# Altium PCB PCB-CPU-fixe1.PcbDoc (part 1 of 3)
Units mil, origin at the board's own origin, x right, y up, seen from the top; angles counter-clockwise.
Board outline 6040 x 4120 mil, 6 copper layers (Top Layer, GND, Mid-Layer2, Mid-Layer3, VDD33, Bottom Layer); 111 components, 315 nets, 963 pads, 730 vias.
Unrouted connection lines stored in the file: 3.
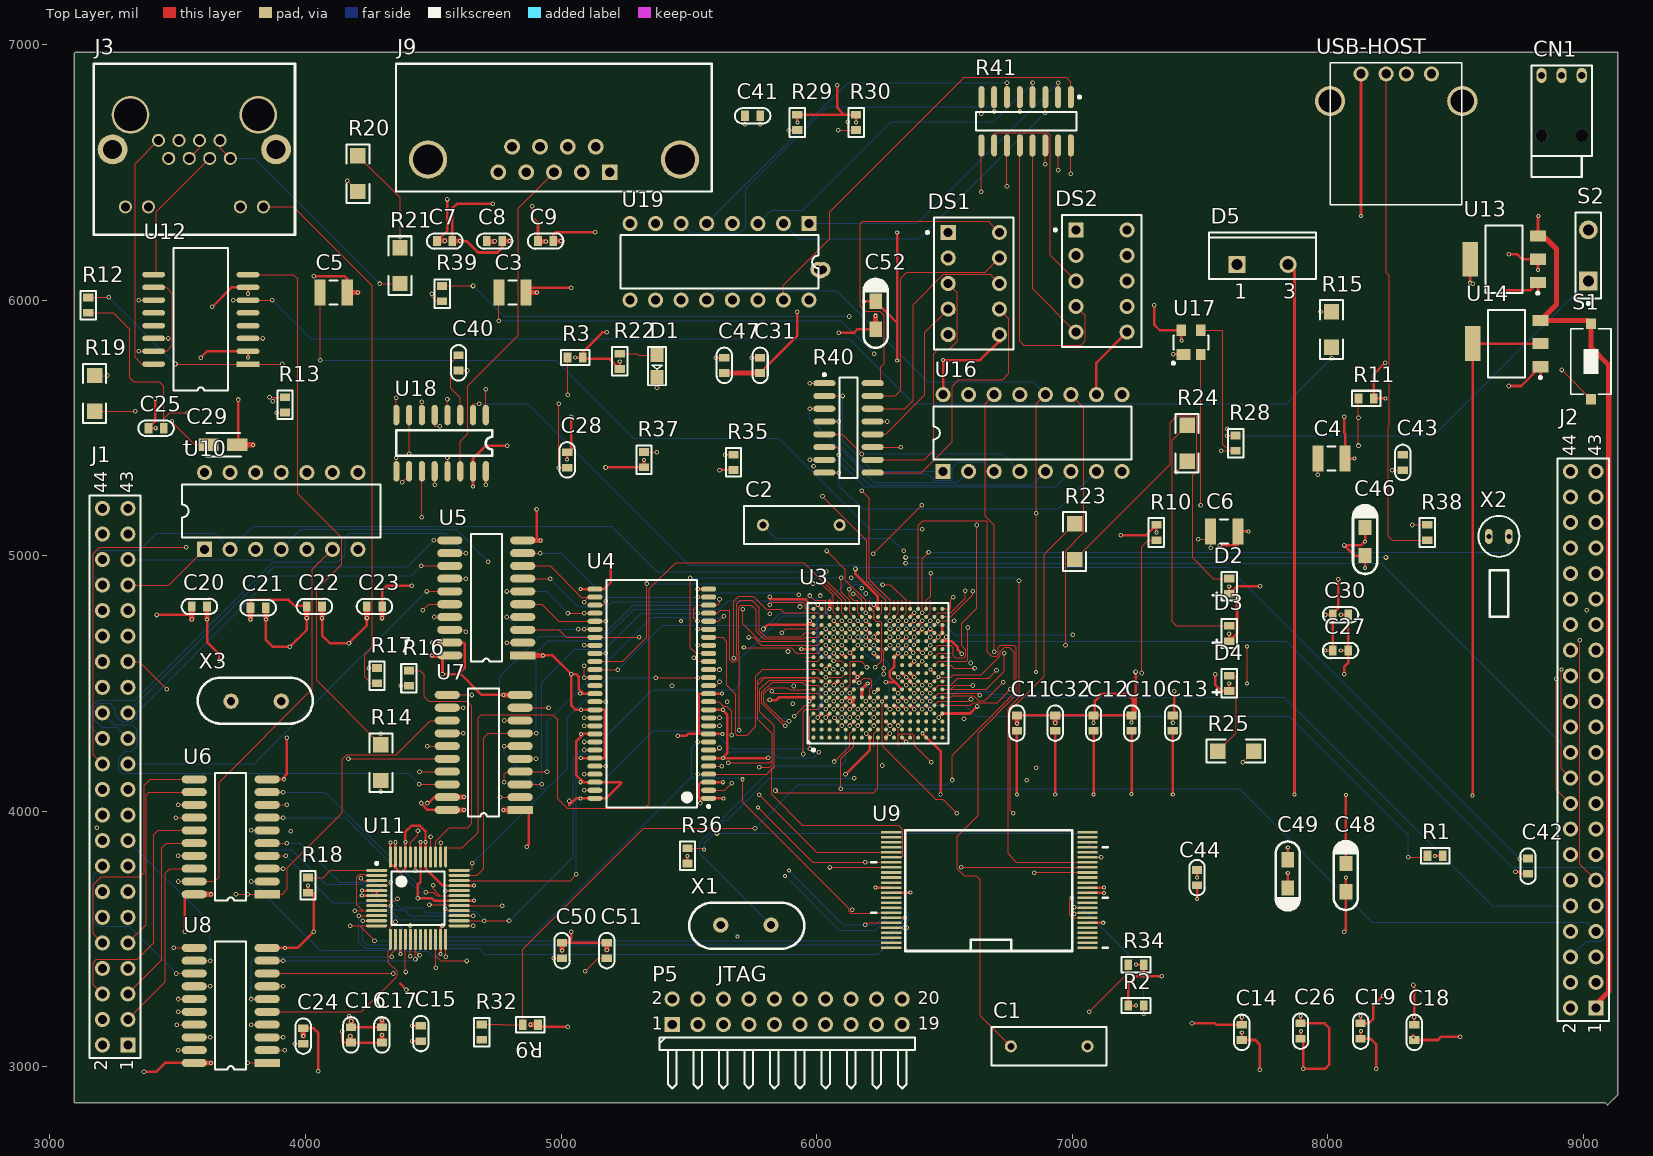
[diagram p0: Top Layer view]
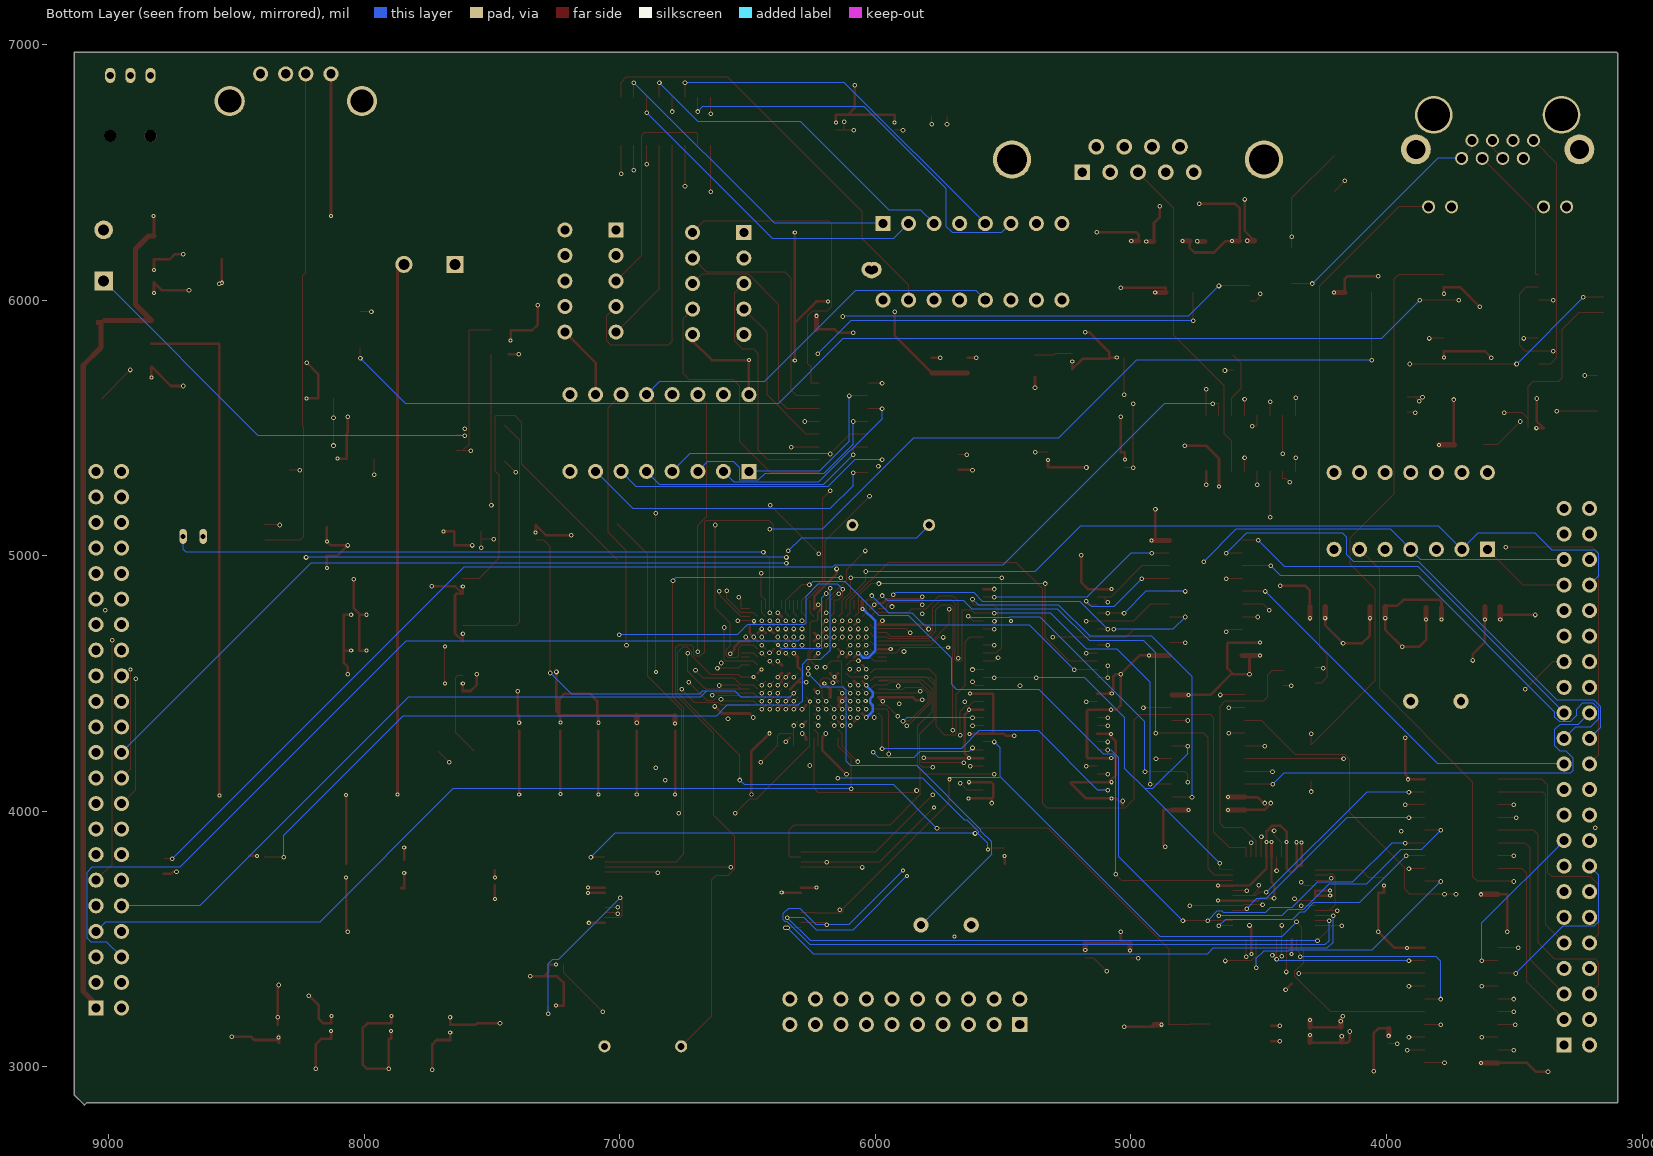
[diagram p1: Bottom Layer view, seen from below]
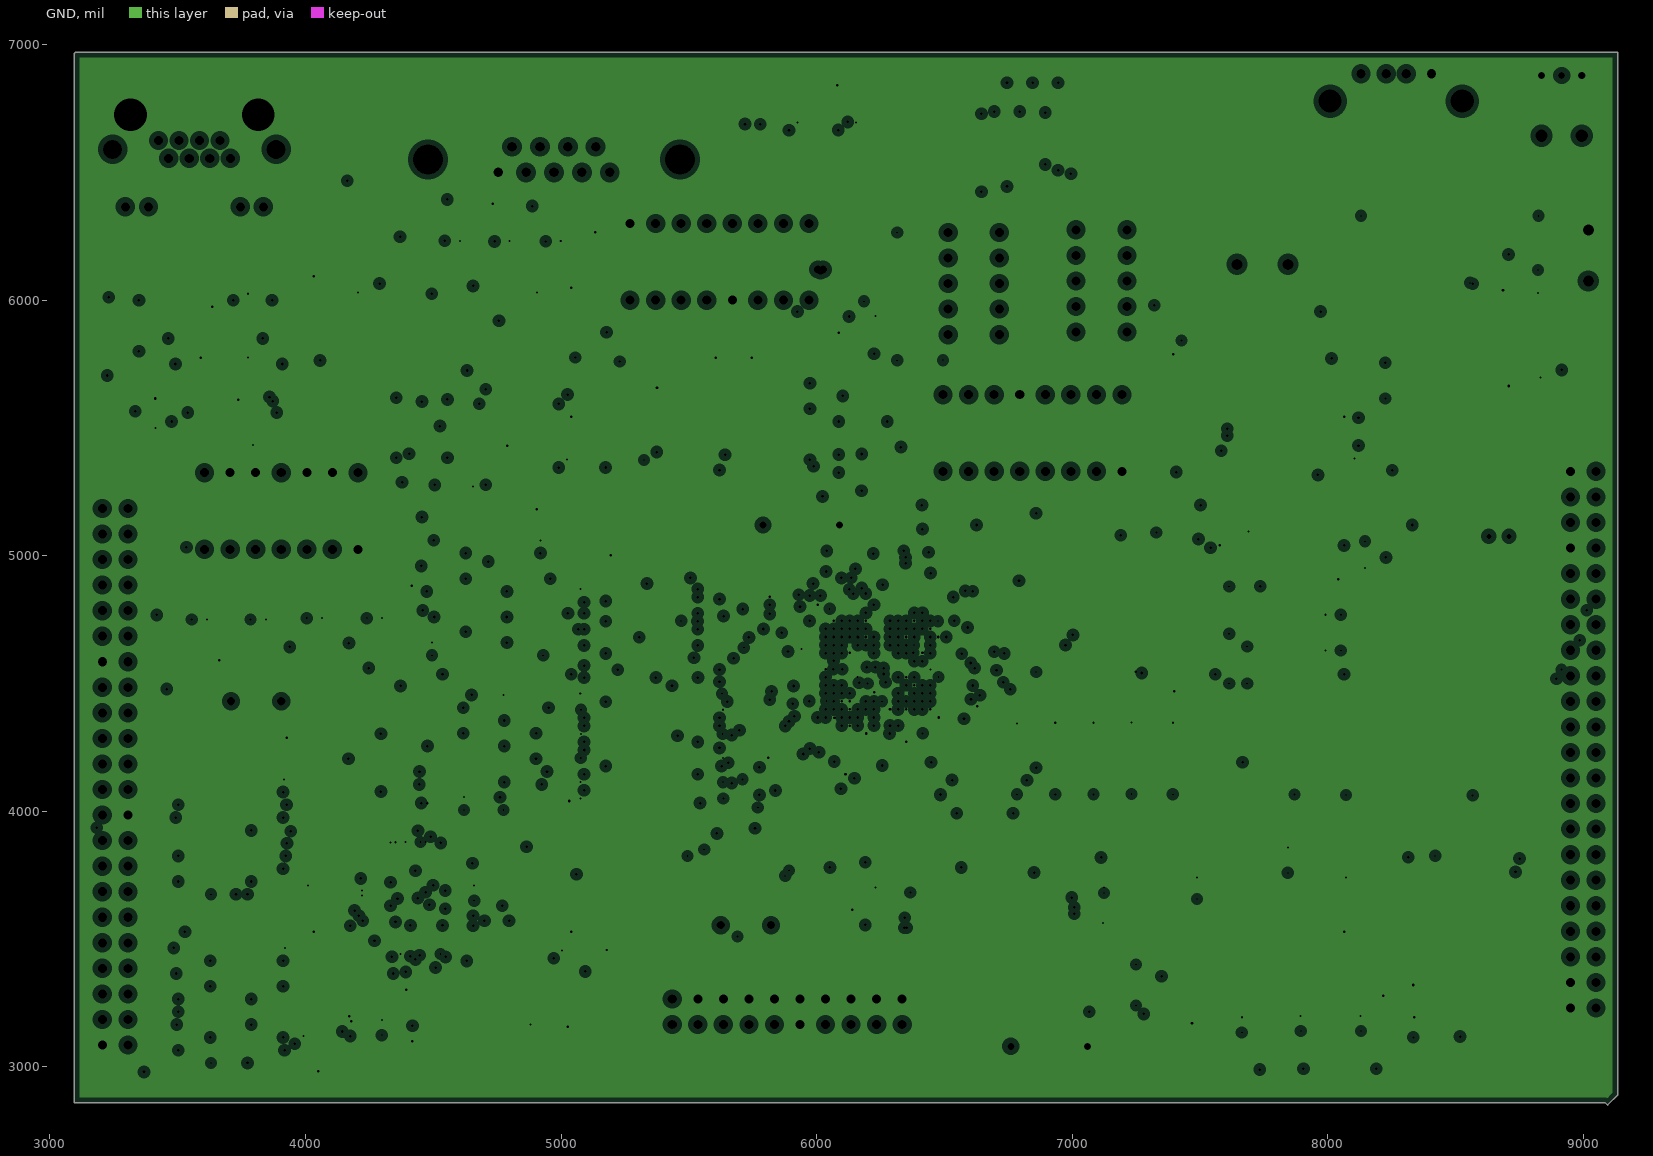
[diagram p2: GND, clearances drawn from the general rule]
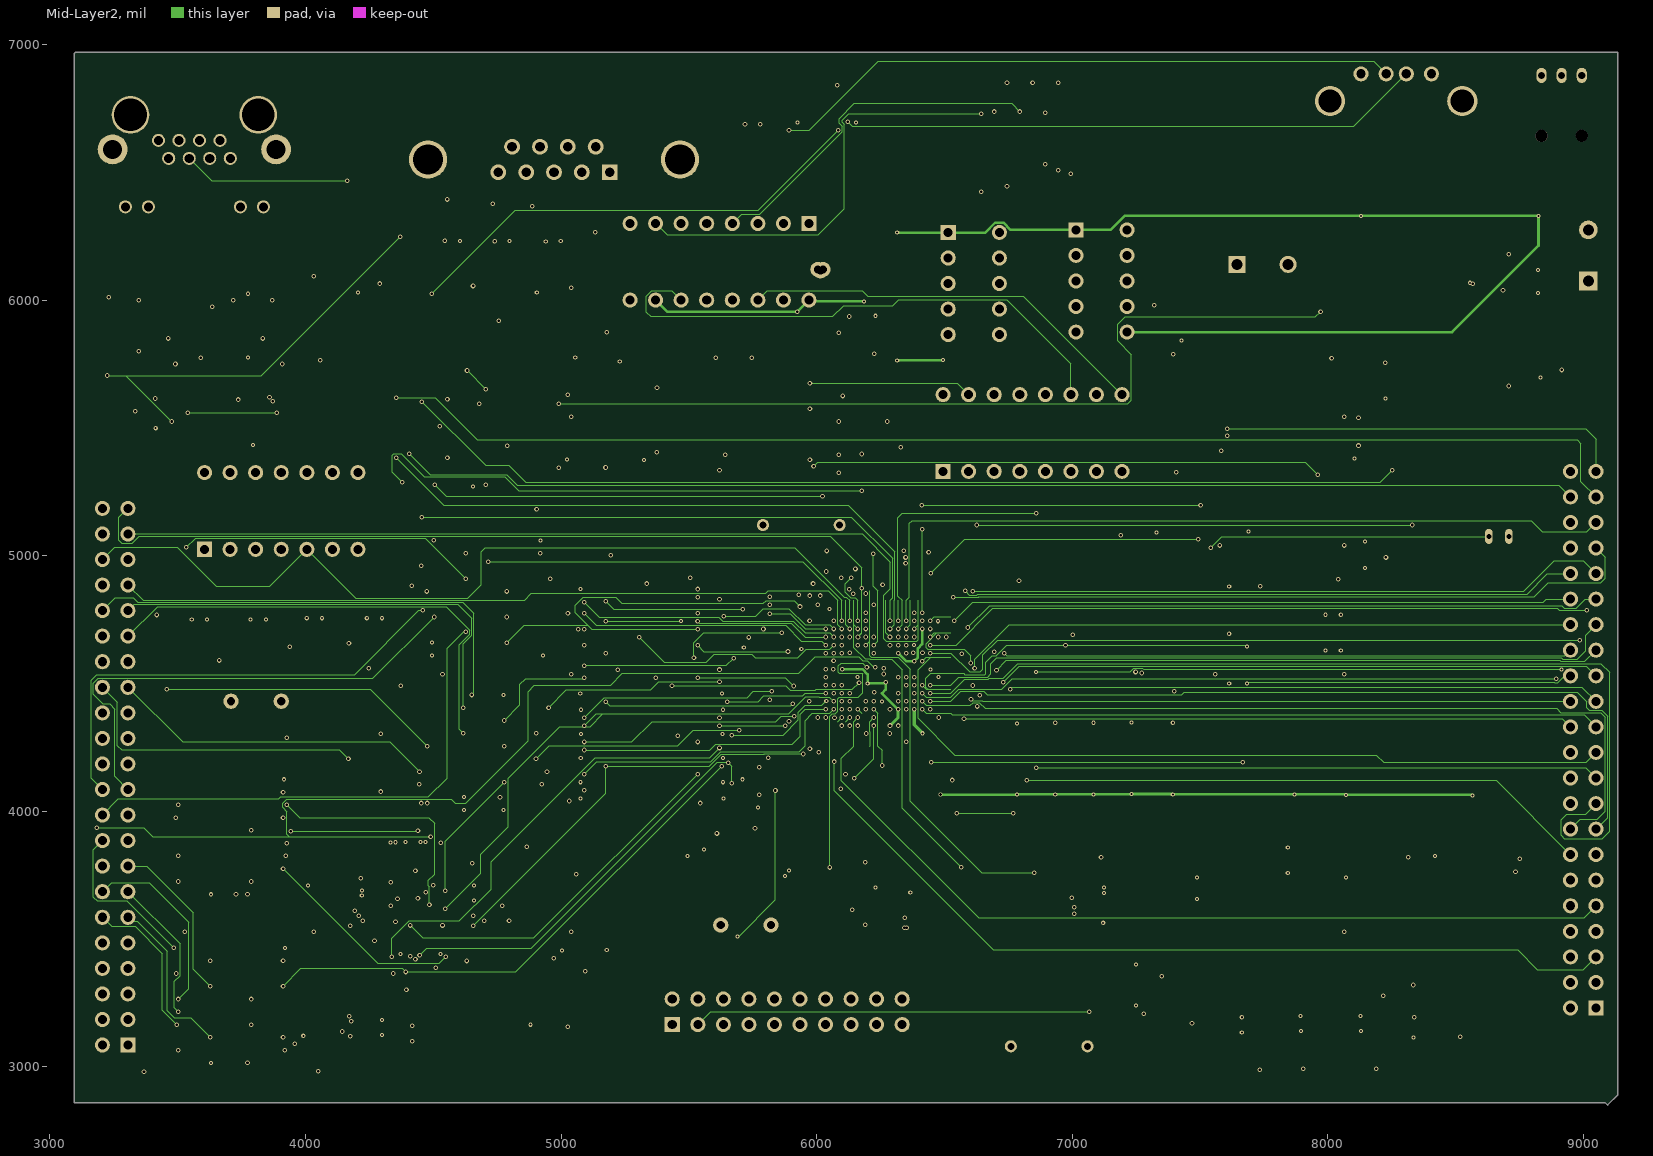
[diagram p3: Mid-Layer2]
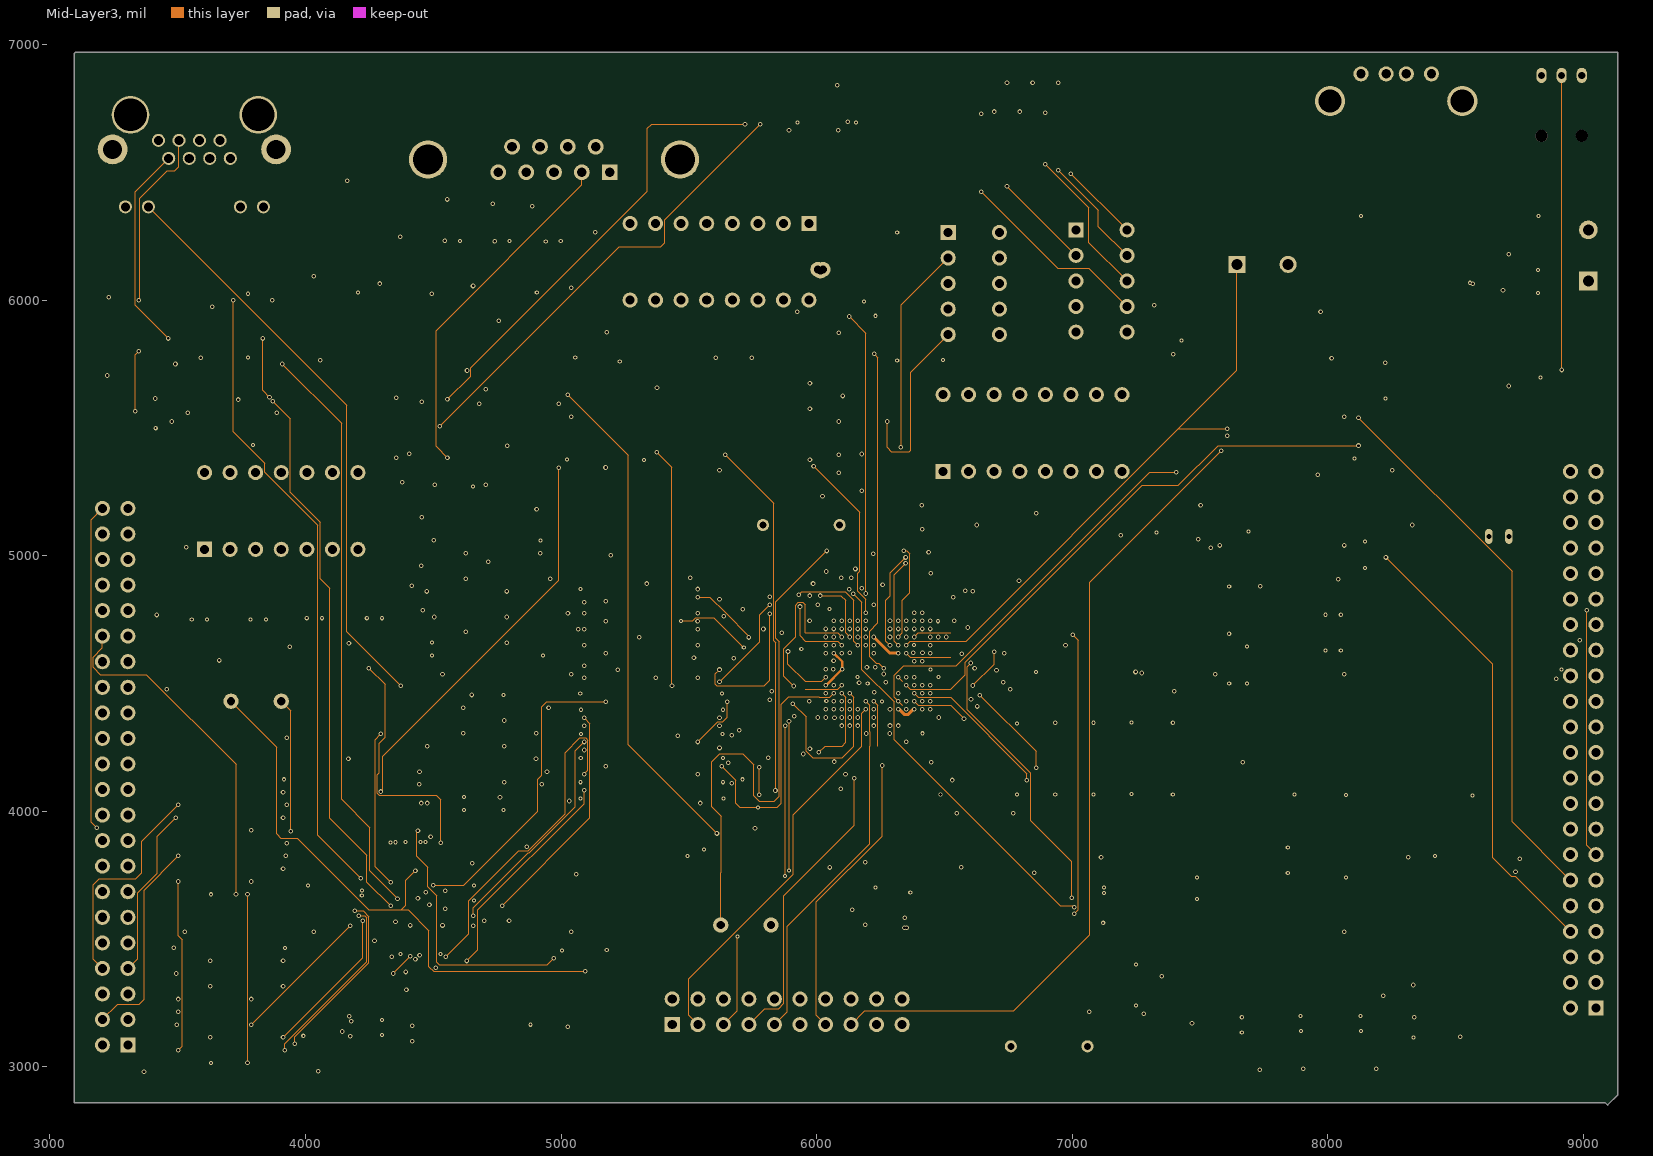
[diagram p4: Mid-Layer3]
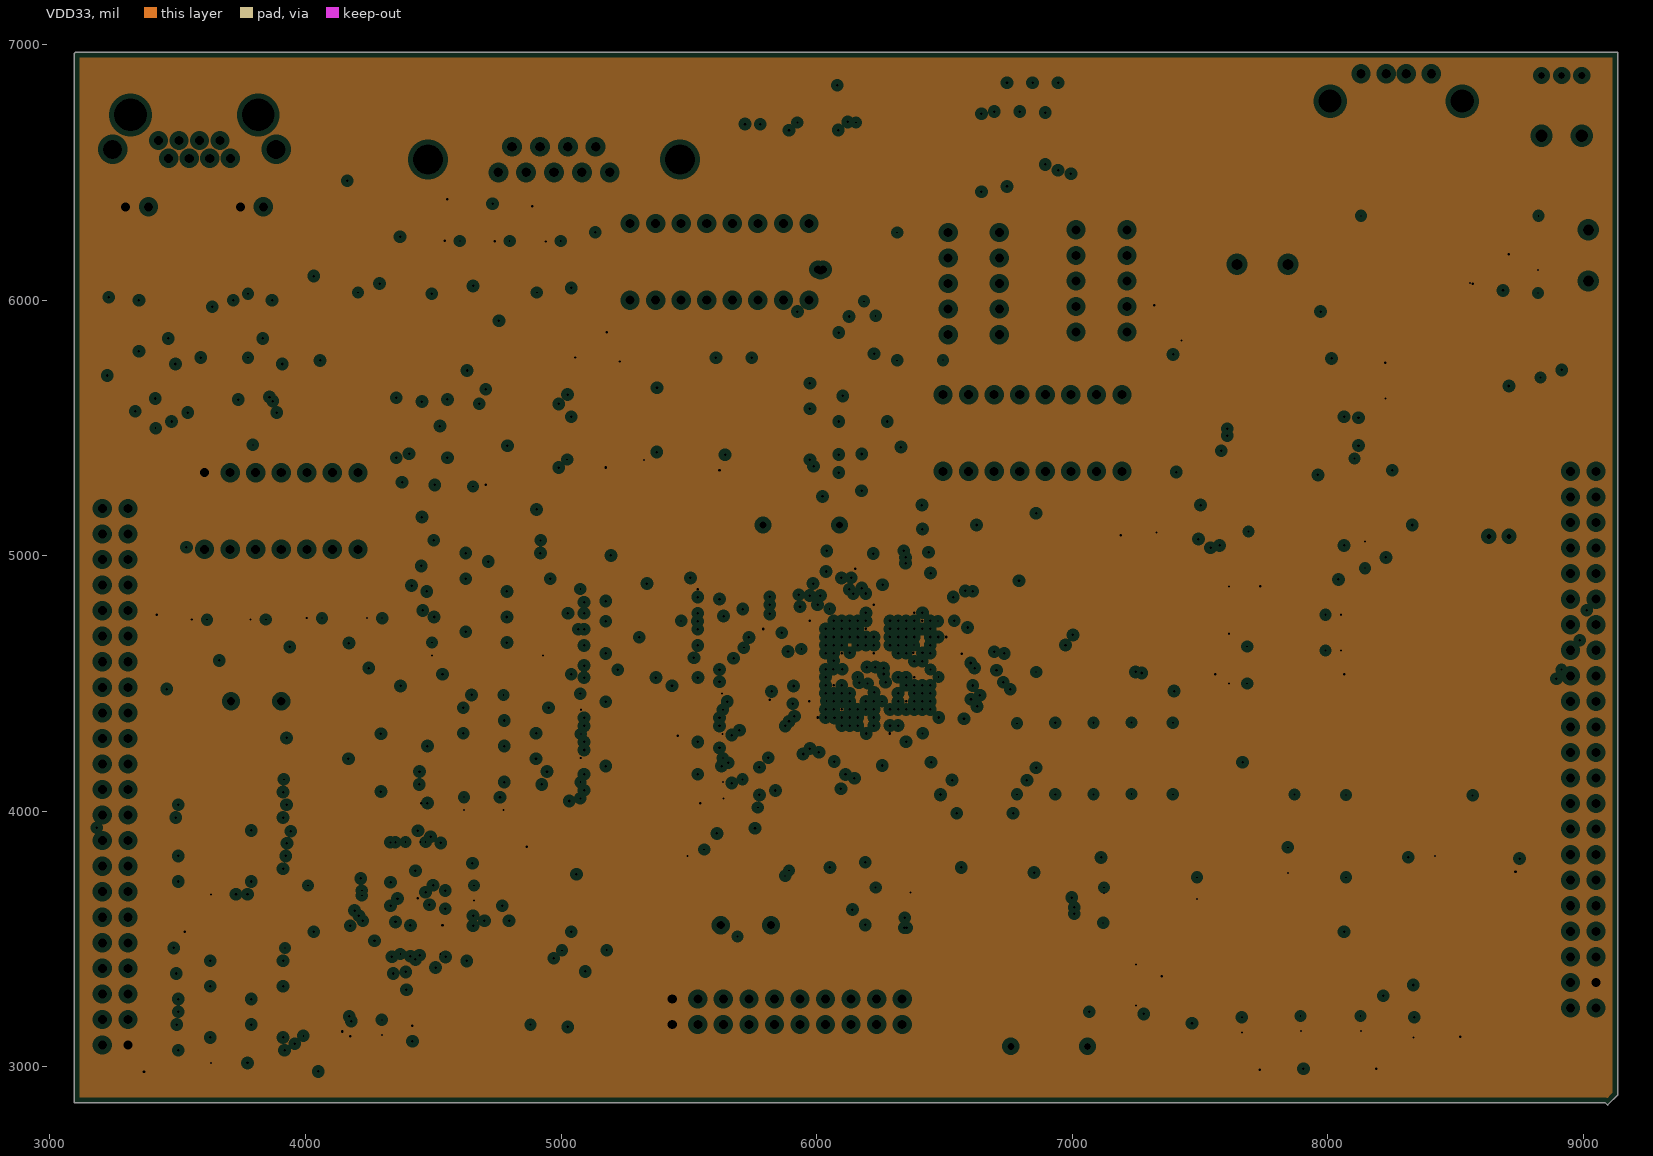
[diagram p5: VDD33, clearances drawn from the general rule]

## Layer stack, top to bottom
Top Layer: signal copper 1.4
Dielectric: core 12.6, FR-4, Dk 4.8
GND: plane copper 1.4, net GND
Dielectric: prepreg 12.6, FR-4, Dk 4.8
Mid-Layer2: signal copper 1.4
Dielectric: core 12.6, FR-4, Dk 4.8
Mid-Layer3: signal copper 1.4
Dielectric: prepreg 12.6, FR-4, Dk 4.8
VDD33: plane copper 1.4, net VDD33
Dielectric: core 12.6, FR-4, Dk 4.8
Bottom Layer: signal copper 1.4

## Board outline
3100,6970 3095,6965 3095,2860 9085,2860 9095,2850 9135,2890 9135,6970 3100,6970

## Design rules (kind name [scope] priority, off if disabled: settings)
Clearance [All] p1: gap=4
MinimumSolderMaskSliver [All] p1: minsoldermaskwidth=0
PlaneClearance [All] p1: clearance=20
PlaneConnect [All] p1: planeconnectstyle=Direct reliefexpansion=20 reliefentries=4 reliefconductorwidth=10 reliefairgap=10
PolygonConnect [All] p1: connectstyle=Relief reliefconductorwidth=10 reliefentries=4 polygonreliefangle="90 Angle" airgapwidth=10
RoutingVias [All] p1: holewidth=10 width=18 viastyle="Through Hole" minholewidth=8 minwidth=16 maxholewidth=28 maxwidth=50
SMDNeckDown [All] p1: percent=80.000
SilkToSilkClearance [All] p1: silktosilkclearance=0
SilkToSolderMaskClearance [IsPad] p1: minsilkscreentomaskgap=0 clearancetoexposedcopper=TRUE
SolderMaskExpansion [All] p1: expansion=4
Width POWERWIDTH30 [InNet('GND') OR InNet('VDD33') OR InNet('VDD50') OR InNet('VDD18')] p1: maxlimit=100 minlimit=10 preferedwidth=10
Width WIDTH [All] p2: maxlimit=10 minlimit=4 preferedwidth=4
23 further rules are at their usual default settings.

## Components (designator, comment, footprint, x,y, rotation, side; value= is the part's Value field where it differs from the comment)
C1 "" RAD-0.3 6910,3080 r180 top
C2 "" RAD-0.3 5940,5120 r180 top
C3 "Cap" 3225 4810,6045 r0 top
C4 "Cap" 3225 8015,5395 r0 top
C5 "Cap" 3225 4110,6045 r0 top
C6 "Cap" 3225 7595,5110 r0 top
C7 "104" 0603A 4515,6230 r0 top
C8 "104" 0603A 4710,6230 r0 top
C9 "104" 0603A 4910,6230 r0 top
C10 "104" 0603A 7233.79,4314.74 r90 top
C11 "104" 0603A 6785,4315 r90 top
C12 "104" 0603A 7085,4315 r90 top
C13 "104" 0603A 7395,4315 r90 top
C14 "104" 0603A 7665,3105 r90 top
C15 "104" 0603A 4450,3160 r270 top
C16 "104" 0603A 4178.79,3095 r90 top
C17 "104" 0603A 4300,3095 r90 top
C18 "104" 0603A 8340,3105 r90 top
C19 "104" 0603A 8130,3110 r90 top
C20 "104" 0603A 3555,4800 r0 top
C21 "104" 0603A 3785,4795 r0 top
C22 "104" 0603A 4005,4800 r0 top
C23 "104" 0603A 4240,4800 r0 top
C24 "104" 0603A 3990,3150 r270 top
C25 "104" 0603A 3445,5500 r180 top
C26 "104" 0603A 7895,3110 r90 top
C27 "104" 0603A 8080,4630 r180 top
C28 "104" 0603A 5025,5345 r90 top
C29 "104/2KV" A型钽电容 3620,5435 r180 top
C30 "104" 0603A 8080,4770 r180 top
C31 "104" 0603A 5780,5715 r90 top
C32 "104" 0603A 6935,4315 r90 top
C40 "104" 0603A 4600,5725 r90 top
C41 "104" 0603A 5720,6720 r0 top
C42 "104" 0603A 8785,3755 r90 top
C43 "104" 0603A 8295,5335 r90 top
C44 "104" 0603A 7490,3710 r90 top
C46 "107" 3216A 8145,5110 r90 top
C47 "104" 0603A 5640,5715 r90 top
C48 "107" 3216A 8070,3795 r90 top
C49 "106" 3216A 7845,3700 r270 top
C50 "22p" 0603A 5005,3425 r90 top
C51 "22p" 0603A 5180,3425 r90 top
C52 "107" 3216A 6230,5995 r90 top
CN1 "DC_JACK" DC25 8915,6565 r0 top
D1 "POWER" LED 5375,5785 r270 top
D2 "LED1" LED0603 7625,4900 r90 top
D3 "LED2" LED0603 7625,4715 r90 top
D4 "LED3" LED0603 7625,4520 r90 top
D5 "BATS4" SFM-T2(3)/X1.7V 7745,6140 r0 top
DS1 "Dpy Red-CC" A 6615,6065 r0 top
DS2 "Dpy Red-CC" A 7115,6075 r0 top
J1 "EXPORT1" HDR2X22 3305,3085 r90 top
J2 "EXPORT2" HDR2X22 9050,3230 r90 top
J3 "RJ45" RJ45 3020,9100 r270 top
J9 "UART0" DB9RA/M 5190,6500 r0 top
"P5      JTAG" "Header 10X2H" HDR2X10H 5435,3165 r0 top
R1 "Res2" 0603R 8390,3825 r0 top
R2 "10K" 0603R 7280,3240 r180 top
R3 "10K" 0603R 5025,5775 r0 top
R9 "Res2" 0603R 4910,3165 r180 top
R10 "Res2" 0603R 7330,5060 r90 top
R11 "Res2" 0603R 8120,5615 r0 top
R12 "Res2" 0603R 3150,5950 r90 top
R13 "Res2" 0603R 3920,5560 r90 top
R14 "75R" 1206 4295,4190 r270 top
R15 "75R" 1206 8015,5885 r90 top
R16 "510" 0603R 4405,4490 r90 top
R17 "510" 0603R 4280,4500 r90 top
R18 "6.8K  1%" 0603R 4010,3680 r90 top
R19 "75R" 1206 3175,5635 r90 top
R20 "75R" 1206 4205,6495 r90 top
R21 "75R" 1206 4370,6135 r90 top
R22 "Res2" 0603R 5230,5730 r90 top
R23 "1K" 1206 7010,5055 r270 top
R24 "1K" 1206 7450,5440 r90 top
R25 "1K" 1206 7640,4234.86 r180 top
R28 "100" 0603R 7640,5410 r90 top
R29 "15K" 0603R 5925,6665 r90 top
R30 "15K" 0603R 6155,6665 r90 top
R32 "Res2" 0603R 4690,3105 r90 top
R34 "10K" 0603R 7280,3400 r180 top
R35 "10K" 0603R 5675,5335 r90 top
R36 "10K" 0603R 5495,3795 r90 top
R37 "10K" 0603R 5325,5345 r90 top
R38 "Res2" 0603R 8390,5060 r90 top
R39 "Res2" 0603R 4535,5995 r90 top
R40 "Res Pack3" SO-16_N 6125,5500 r0 top
R41 "Res Pack3" SO-16_N 6820,6700 r270 top
S1 "SW_PUSH" SW-PB2 9030,5760 r90 top
S2 "RESET" SPST-2 9020,6175 r90 top
U3 "S3C2410X" FBGA272 6240,4540 r90 top
U4 "K4S511632B-TC75" 54_TSOP2_400AF_N 5355,4460 r180 top
U5 "M74HC245B1R" SOP-20 4710,4810 r180 top
U6 "M74HC245B1R" SOP-20 3710,3875 r180 top
U7 "M74HC245B1R" SOP-20 4700,4205 r180 top
U8 "M74HC245B1R" SOP-20 3710,3215 r180 top
U9 "K9F1208" TSOP48 7060,3465 r180 top
U10 "74HC21N" N014 3905,5175 r0 top
U11 "DM9000AE" LQFP-48_M 4440,3660 r0 top
U12 "H1102NL" H1102 2610,4785 r0 top
U13 "AS1117MP-3.3" SOT-223 8690,6160 r90 top
U14 "AS1117MP-3.3" SOT-223 8700,5830 r90 top
U16 "SN74HC595N" N016 6845,5480 r0 top
U17 "MAX811-EUS-T" SOT143 7465,5835 r0 top
U18 "MAX3232" SSOP16 4705,5550 r0 top
U19 "SN74HC595N" N016 5620,6150 r180 top
USB-HOST "USB Port A type" USB-A 8130,6885 r0 top
X1 "12M" OSC2PR-1 5625,3555 r0 top
X2 "32.768k" XTAL-B 8670,5075 r0 top
X3 "25M" OSC2PR-1 3905,4430 r180 top

## Footprints (in the part's own frame and the unit in brackets; to place one, negate y for a bottom-side part, rotate by r counter-clockwise, add the part's x,y. Pads: shape width x height; smd on the part's side, far side on the other; paste and mask are expansions set on the pad)
54_TSOP2_400AF_N [mm] "SOP, 54-Leads, Body 22.5x10.16mm, Pitch 0.8mm, IPC Medium Density"
  oval 1.5x0.5 smd: 1(-5.65,10.4) 2(-5.65,9.6) 3(-5.65,8.8) 4(-5.65,8) 5(-5.65,7.2) 6(-5.65,6.4) 7(-5.65,5.6) 8(-5.65,4.8) 9(-5.65,4) 10(-5.65,3.2) 11(-5.65,2.4) 12(-5.65,1.6) 13(-5.65,0.8) 14(-5.65,0) 15(-5.65,-0.8) 16(-5.65,-1.6) 17(-5.65,-2.4) 18(-5.65,-3.2) 19(-5.65,-4) 20(-5.65,-4.8) 21(-5.65,-5.6) 22(-5.65,-6.4) 23(-5.65,-7.2) 24(-5.65,-8) 25(-5.65,-8.8) 26(-5.65,-9.6) 27(-5.65,-10.4) 28(5.65,-10.4) 29(5.65,-9.6) 30(5.65,-8.8) 31(5.65,-8) 32(5.65,-7.2) 33(5.65,-6.4) 34(5.65,-5.6) 35(5.65,-4.8) 36(5.65,-4) 37(5.65,-3.2) 38(5.65,-2.4) 39(5.65,-1.6) 40(5.65,-0.8) 41(5.65,0) 42(5.65,0.8) 43(5.65,1.6) 44(5.65,2.4) 45(5.65,3.2) 46(5.65,4) 47(5.65,4.8) 48(5.65,5.6) 49(5.65,6.4) 50(5.65,7.2) 51(5.65,8) 52(5.65,8.8) 53(5.65,9.6) 54(5.65,10.4)
  silkscreen extent -5.77,-11.3 4.5,11.32, body extent -5.08,-11.23 5.08,11.23, height 1.2
0603A [mil]
  rect 30x40 smd: 1(-0.26,1.21) 2(59.74,1.21)
  silkscreen extent -40,-29 99,31
0603R [mil]
  rect 30x40 smd: 1(0.47,0.42) 2(60.47,0.42)
  silkscreen extent -26,-30 87,30
1206 [mil] "贴片元件"
  rect 60x60 smd: 1(-70,0) 2(70,0)
  silkscreen extent -115,-45 115,45, body extent -75,-35 75,35, height 39
3216A [mil]
  rect 60x50 smd: 1(0.44,-1.2) 2(-109.56,-1.2)
  silkscreen extent -182,-48 88,46
3225 [mm]
  rect 1.1x2.6 smd: 1(-1.35,-0.381) 2(1.35,-0.381)
  silkscreen extent -0.4,-1.58 0.4,0.82, body extent -1.68,-1.7 1.68,0.94, height 0.9
A [mm] "LED, 7-Segment Display, 7.62 mm, RHD; 10 Leads; Row Space 5.08 mm; Pitch 2.54 mm"
  rect 1.5x1.5 hole 0.9: 1(-2.54,5.08)
  round 1.5 hole 0.9: 2(-2.54,2.54) 3(-2.54,0) 4(-2.54,-2.54) 5(-2.54,-5.08) 6(2.54,-5.08) 7(2.54,-2.54) 8(2.54,0) 9(2.54,2.54) 10(2.54,5.08)
  silkscreen extent -4.72,-6.55 3.95,6.55, body extent -3.95,-6.55 3.95,6.55, height 6.34
A型钽电容 [mil]
  rect 80x50 smd: 1(-0.23,1.09) 2(-113.23,1.09)
  silkscreen extent -128,-45 10,47
DB9RA/M [mil]
  rect 62x62 hole 38: 1(0.38,0.31)
  round 62 hole 38: 2(-108.62,0.31) 3(-217.62,0.31) 4(-326.62,0.31) 5(-435.62,0.31) 6(-54.62,100.31) 7(-163.62,100.31) 8(-272.62,100.31) 9(-381.62,100.31)
  round 150 hole 118.11: ""(-710.62,50.31) ""(275.38,50.31)
  silkscreen extent -836,-75 400,425
DC25 [mm]
  oval 1x1.5 hole 0.7: 1(2.012,7.989) 2(0.012,7.989) 3(-1.988,7.989)
  round 1.2 hole 1.2: A(-1.988,1.989) B(2.012,1.989)
  silkscreen extent -2.99,-2.11 3.01,8.99
FBGA272 [mm] "BGA, 272-Leads, Body 14x14mm, Pitch 0.8mm"
  round 0.4 smd: A1(-6.4,6.4) A2(-5.6,6.4) A3(-4.8,6.4) A4(-4,6.4) A5(-3.2,6.4) A6(-2.4,6.4) A7(-1.6,6.4) A8(-0.8,6.4) A9(0,6.4) A10(0.8,6.4) A11(1.6,6.4) A12(2.4,6.4) A13(3.2,6.4) A14(4,6.4) A15(4.8,6.4) A16(5.6,6.4) A17(6.4,6.4) B1(-6.4,5.6) B2(-5.6,5.6) B3(-4.8,5.6) B4(-4,5.6) B5(-3.2,5.6) B6(-2.4,5.6) B7(-1.6,5.6) B8(-0.8,5.6) B9(0,5.6) B10(0.8,5.6) B11(1.6,5.6) B12(2.4,5.6) B13(3.2,5.6) B14(4,5.6) B15(4.8,5.6) B16(5.6,5.6) B17(6.4,5.6) C1(-6.4,4.8) C2(-5.6,4.8) C3(-4.8,4.8) C4(-4,4.8) C5(-3.2,4.8) C6(-2.4,4.8) C7(-1.6,4.8) C8(-0.8,4.8) C9(0,4.8) C10(0.8,4.8) C11(1.6,4.8) C12(2.4,4.8) C13(3.2,4.8) C14(4,4.8) C15(4.8,4.8) C16(5.6,4.8) C17(6.4,4.8) D1(-6.4,4) D2(-5.6,4) D3(-4.8,4) D4(-4,4) D5(-3.2,4) D6(-2.4,4) D7(-1.6,4) D8(-0.8,4) D9(0,4) D10(0.8,4) D11(1.6,4) D12(2.4,4) D13(3.2,4) D14(4,4) D15(4.8,4) D16(5.6,4) D17(6.4,4) E1(-6.4,3.2) E2(-5.6,3.2) E3(-4.8,3.2) E4(-4,3.2) E5(-3.2,3.2) E6(-2.4,3.2) E7(-1.6,3.2) E8(-0.8,3.2) E9(0,3.2) E10(0.8,3.2) E11(1.6,3.2) E12(2.4,3.2) E13(3.2,3.2) E14(4,3.2) E15(4.8,3.2) E16(5.6,3.2) E17(6.4,3.2) F1(-6.4,2.4) F2(-5.6,2.4) F3(-4.8,2.4) F4(-4,2.4) F5(-3.2,2.4) F6(-2.4,2.4) F7(-1.6,2.4) F8(-0.8,2.4) F9(0,2.4) F10(0.8,2.4) F11(1.6,2.4) F12(2.4,2.4) F13(3.2,2.4) F14(4,2.4) F15(4.8,2.4) F16(5.6,2.4) F17(6.4,2.4) G1(-6.4,1.6) G2(-5.6,1.6) G3(-4.8,1.6) G4(-4,1.6) G5(-3.2,1.6) G6(-2.4,1.6) G7(-1.6,1.6) G9(0,1.6) G11(1.6,1.6) G12(2.4,1.6) G13(3.2,1.6) G14(4,1.6) G15(4.8,1.6) G16(5.6,1.6) G17(6.4,1.6) H1(-6.4,0.8) H2(-5.6,0.8) H3(-4.8,0.8) H4(-4,0.8) H5(-3.2,0.8) H6(-2.4,0.8) H12(2.4,0.8) H13(3.2,0.8) H14(4,0.8) H15(4.8,0.8) H16(5.6,0.8) H17(6.4,0.8) J1(-6.4,0) J2(-5.6,0) J3(-4.8,0) J4(-4,0) J5(-3.2,0) J6(-2.4,0) J7(-1.6,0) J11(1.6,0) J12(2.4,0) J13(3.2,0) J14(4,0) J15(4.8,0) J16(5.6,0) J17(6.4,0) K1(-6.4,-0.8) K2(-5.6,-0.8) K3(-4.8,-0.8) K4(-4,-0.8) K5(-3.2,-0.8) K6(-2.4,-0.8) K12(2.4,-0.8) K13(3.2,-0.8) K14(4,-0.8) K15(4.8,-0.8) K16(5.6,-0.8) K17(6.4,-0.8) L1(-6.4,-1.6) L2(-5.6,-1.6) L3(-4.8,-1.6) L4(-4,-1.6) L5(-3.2,-1.6) L6(-2.4,-1.6) L7(-1.6,-1.6) L9(0,-1.6) L11(1.6,-1.6) L12(2.4,-1.6) L13(3.2,-1.6) L14(4,-1.6) L15(4.8,-1.6) L16(5.6,-1.6) L17(6.4,-1.6) M1(-6.4,-2.4) M2(-5.6,-2.4) M3(-4.8,-2.4) M4(-4,-2.4) M5(-3.2,-2.4) M6(-2.4,-2.4) M7(-1.6,-2.4) M8(-0.8,-2.4) M9(0,-2.4) M10(0.8,-2.4) M11(1.6,-2.4) M12(2.4,-2.4) M13(3.2,-2.4) M14(4,-2.4) M15(4.8,-2.4) M16(5.6,-2.4) M17(6.4,-2.4) N1(-6.4,-3.2) N2(-5.6,-3.2) N3(-4.8,-3.2) N4(-4,-3.2) N5(-3.2,-3.2) N6(-2.4,-3.2) N7(-1.6,-3.2) N8(-0.8,-3.2) N9(0,-3.2) N10(0.8,-3.2) N11(1.6,-3.2) N12(2.4,-3.2) N13(3.2,-3.2) N14(4,-3.2) N15(4.8,-3.2) N16(5.6,-3.2) N17(6.4,-3.2) P1(-6.4,-4) P2(-5.6,-4) P3(-4.8,-4) P4(-4,-4) P5(-3.2,-4) P6(-2.4,-4) P7(-1.6,-4) P8(-0.8,-4) P9(0,-4) P10(0.8,-4) P11(1.6,-4) P12(2.4,-4) P13(3.2,-4) P14(4,-4) P15(4.8,-4) P16(5.6,-4) P17(6.4,-4) R1(-6.4,-4.8) R2(-5.6,-4.8) R3(-4.8,-4.8) R4(-4,-4.8) R5(-3.2,-4.8) R6(-2.4,-4.8) R7(-1.6,-4.8) R8(-0.8,-4.8) R9(0,-4.8) R10(0.8,-4.8) R11(1.6,-4.8) R12(2.4,-4.8) R13(3.2,-4.8) R14(4,-4.8) R15(4.8,-4.8) R16(5.6,-4.8) R17(6.4,-4.8) T1(-6.4,-5.6) T2(-5.6,-5.6) T3(-4.8,-5.6) T4(-4,-5.6) T5(-3.2,-5.6) T6(-2.4,-5.6) T7(-1.6,-5.6) T8(-0.8,-5.6) T9(0,-5.6) T10(0.8,-5.6) T11(1.6,-5.6) T12(2.4,-5.6) T13(3.2,-5.6) T14(4,-5.6) T15(4.8,-5.6) T16(5.6,-5.6) T17(6.4,-5.6) U1(-6.4,-6.4) U2(-5.6,-6.4) U3(-4.8,-6.4) U4(-4,-6.4) U5(-3.2,-6.4) U6(-2.4,-6.4) U7(-1.6,-6.4) U8(-0.8,-6.4) U9(0,-6.4) U10(0.8,-6.4) U11(1.6,-6.4) U12(2.4,-6.4) U13(3.2,-6.4) U14(4,-6.4) U15(4.8,-6.4) U16(5.6,-6.4) U17(6.4,-6.4)
  silkscreen extent -7.77,-7 7,7, body extent -7,-7 7,7, height 1.16
H1102 [mm] "H1102"
  rect 2.27x0.55 smd: 1(29.591,24.511)
  oval 2.27x0.55 smd: 2(29.591,25.781) 3(29.591,27.051) 4(29.591,28.321) 5(29.591,29.591) 6(29.591,30.861) 7(29.591,32.131) 8(29.591,33.401) 9(20.211,33.401) 10(20.211,32.131) 11(20.211,30.861) 12(20.211,29.591) 13(20.211,28.321) 14(20.211,27.051) 15(20.211,25.781) 16(20.211,24.511)
  silkscreen extent 22.18,21.88 27.62,36.04
HDR2X10H [mm] "Connector; Header; 10x2 Position; Right Angle"
  rect 1.5x1.5 hole 0.9: 1(0,0)
  round 1.5 hole 0.9: 2(0,2.54) 3(2.54,0) 4(2.54,2.54) 5(5.08,0) 6(5.08,2.54) 7(7.62,0) 8(7.62,2.54) 9(10.16,0) 10(10.16,2.54) 11(12.7,0) 12(12.7,2.54) 13(15.24,0) 14(15.24,2.54) 15(17.78,0) 16(17.78,2.54) 17(20.32,0) 18(20.32,2.54) 19(22.86,0) 20(22.86,2.54)
  silkscreen extent -1.27,-6.35 24.13,-1.27
HDR2X22 [mm] "Connector; Header; 22x2 Position"
  rect 1.5x1.5 hole 0.9: 1(0,0)
  round 1.5 hole 0.9: 2(0,2.54) 3(2.54,0) 4(2.54,2.54) 5(5.08,0) 6(5.08,2.54) 7(7.62,0) 8(7.62,2.54) 9(10.16,0) 10(10.16,2.54) 11(12.7,0) 12(12.7,2.54) 13(15.24,0) 14(15.24,2.54) 15(17.78,0) 16(17.78,2.54) 17(20.32,0) 18(20.32,2.54) 19(22.86,0) 20(22.86,2.54) 21(25.4,0) 22(25.4,2.54) 23(27.94,0) 24(27.94,2.54) 25(30.48,0) 26(30.48,2.54) 27(33.02,0) 28(33.02,2.54) 29(35.56,0) 30(35.56,2.54) 31(38.1,0) 32(38.1,2.54) 33(40.64,0) 34(40.64,2.54) 35(43.18,0) 36(43.18,2.54) 37(45.72,0) 38(45.72,2.54) 39(48.26,0) 40(48.26,2.54) 41(50.8,0) 42(50.8,2.54) 43(53.34,0) 44(53.34,2.54)
  silkscreen extent -1.27,-1.27 54.61,3.81
LED [mil]
  rect 55.12x50 smd: 1(-0.13,0.5) 2(86.87,0.5)
  silkscreen extent -32,-35 118,36
LED0603 [mil]
  rect 30x40 smd: 1(-49.53,10.42) 2(10.47,10.42)
  silkscreen extent -76,-20 37,75
LQFP-48_M [mm] "Thin QFP, 48-Leads, Body 7x7mm, Pitch 0.5mm, IPC Low Density"
  oval 2.1x0.3 smd: 1(-4.1,2.75) 2(-4.1,2.25) 3(-4.1,1.75) 4(-4.1,1.25) 5(-4.1,0.75) 6(-4.1,0.25) 7(-4.1,-0.25) 8(-4.1,-0.75) 9(-4.1,-1.25) 10(-4.1,-1.75) 11(-4.1,-2.25) 12(-4.1,-2.75) 25(4.1,-2.75) 26(4.1,-2.25) 27(4.1,-1.75) 28(4.1,-1.25) 29(4.1,-0.75) 30(4.1,-0.25) 31(4.1,0.25) 32(4.1,0.75) 33(4.1,1.25) 34(4.1,1.75) 35(4.1,2.25) 36(4.1,2.75)
  oval 0.3x2.1 smd: 13(-2.75,-4.1) 14(-2.25,-4.1) 15(-1.75,-4.1) 16(-1.25,-4.1) 17(-0.75,-4.1) 18(-0.25,-4.1) 19(0.25,-4.1) 20(0.75,-4.1) 21(1.25,-4.1) 22(1.75,-4.1) 23(2.25,-4.1) 24(2.75,-4.1) 37(2.75,4.1) 38(2.25,4.1) 39(1.75,4.1) 40(1.25,4.1) 41(0.75,4.1) 42(0.25,4.1) 43(-0.25,4.1) 44(-0.75,4.1) 45(-1.25,4.1) 46(-1.75,4.1) 47(-2.25,4.1) 48(-2.75,4.1)
  silkscreen extent -4.22,-2.65 2.65,3.57, body extent -3.5,-3.5 3.5,3.5, height 1.6
N014 [mm] "DIP; 14 Leads; Row Spacing 7.62 mm; Pitch 2.54 mm"
  rect 1.5x1.5 hole 0.9: 1(-7.62,-3.81)
  round 1.5 hole 0.9: 2(-5.08,-3.81) 3(-2.54,-3.81) 4(0,-3.81) 5(2.54,-3.81) 6(5.08,-3.81) 7(7.62,-3.81) 8(7.62,3.81) 9(5.08,3.81) 10(2.54,3.81) 11(0,3.81) 12(-2.54,3.81) 13(-5.08,3.81) 14(-7.62,3.81)
  silkscreen extent -9.85,-2.65 9.85,2.65
N016 [mm] "DIP; 16 Leads; Row Spacing 7.62 mm; Pitch 2.54 mm"
  rect 1.5x1.5 hole 0.9: 1(-8.89,-3.81)
  round 1.5 hole 0.9: 2(-6.35,-3.81) 3(-3.81,-3.81) 4(-1.27,-3.81) 5(1.27,-3.81) 6(3.81,-3.81) 7(6.35,-3.81) 8(8.89,-3.81) 9(8.89,3.81) 10(6.35,3.81) 11(3.81,3.81) 12(1.27,3.81) 13(-1.27,3.81) 14(-3.81,3.81) 15(-6.35,3.81) 16(-8.89,3.81)
  silkscreen extent -9.85,-2.65 9.85,2.65
OSC2PR-1 [mil]
  round 60 hole 32: 1(-0.31,-0.47) 2(196.69,-0.47)
  silkscreen extent -123,-93 327,87
RAD-0.3 [mm] "Radial Cap, Thru-Hole; 2 Leads; 0.3 in Pin Spacing"
  round 1.2 hole 0.7: 1(-3.81,0) 2(3.81,0)
  silkscreen extent -5.71,-1.91 5.71,1.91
RJ45 [mm] "RJ45"
  round 2.97 hole 1.9: 0(63.754,5.718) 0(63.754,21.968)
  round 1.3 hole 0.9: 1(62.864,10.273) 2(64.644,11.293) 3(62.864,12.313) 4(64.644,13.333) 5(62.864,14.353) 6(64.644,15.373) 7(62.864,16.393) 8(64.644,17.413) 9(69.464,6.983) 10(69.464,9.273) 11(69.464,18.413) 12(69.464,20.703)
  round 3.75 hole 3.25: 13(60.324,20.193) 14(60.324,7.493)
  silkscreen extent 55.25,3.84 72.25,23.84
SFM-T2(3)/X1.7V [mm] "TO, Thru-Hole, Vertical, Heatsink Mounted; 3 In-Line Leads (1 Absent); Pitch 2.54 mm"
  rect 1.7x1.7 hole 1.1: 1(-2.54,0)
  round 1.7 hole 1.1: 3(2.54,0)
  silkscreen extent -5.3,-1.45 5.3,3.15
SO-16_N [mm] "SOIC, 16-Leads, Body 9.9x3.9mm, Pitch 1.27mm, IPC Medium Density"
  oval 2.2x0.6 smd: 1(-2.4,4.445) 2(-2.4,3.175) 3(-2.4,1.905) 4(-2.4,0.635) 5(-2.4,-0.635) 6(-2.4,-1.905) 7(-2.4,-3.175) 8(-2.4,-4.445) 9(2.4,-4.445) 10(2.4,-3.175) 11(2.4,-1.905) 12(2.4,-0.635) 13(2.4,0.635) 14(2.4,1.905) 15(2.4,3.175) 16(2.4,4.445)
  silkscreen extent -2.52,-5 0.9,5.42, body extent -2,-5 2,5, height 1.75
SOP-20 [mm] "74ls244"
  rect 2.5x0.8 smd: 1(-3.556,5.08)
  oval 2.5x0.8 smd: 2(-3.556,3.81) 3(-3.556,2.54) 4(-3.556,1.27) 5(-3.556,0) 6(-3.556,-1.27) 7(-3.556,-2.54) 8(-3.556,-3.81) 9(-3.556,-5.08) 10(-3.556,-6.35) 11(3.694,-6.35) 12(3.694,-5.08) 13(3.694,-3.81) 14(3.694,-2.54) 15(3.694,-1.27) 16(3.694,0) 17(3.694,1.27) 18(3.694,2.54) 19(3.694,3.81) 20(3.694,5.08)
  silkscreen extent -1.47,-6.98 1.61,5.71
SOT143 [mm] "SOT-143; 4 Leads; Body 3 x 2.5 mm, inc. leads (LxW max)"
  rect 1.4x1.1 smd: 1(-0.75,-1.2)
  rect 0.95x1.1 smd: 2(0.95,-1.2) 3(0.95,1.2) 4(-0.95,1.2)
  silkscreen extent -1.87,-2.2 1.75,0.7
SOT-223 [mm]
  rect 1.1x1.55 smd: 1(-2.3,-3.375) 2(0,-3.375) 3(2.3,-3.375)
  rect 3.45x1.55 smd: 4(0,3.375)
  silkscreen extent -3.5,-3.48 3.35,1.85, body extent -3.3,-3.94 3.3,3.43, height 0.8
SPST-2 [mm] "Circuit Breaker; 2 Leads"
  rect 1.85x1.85 hole 1.1: 1(-2.54,0)
  round 1.85 hole 1.1: 2(2.54,0)
  silkscreen extent -4.89,-1.27 4.28,1.27
SSOP16 [mil]
  oval 24x80 smd: 1(0.44,0.31) 2(-49.56,0.31) 3(-99.56,0.31) 4(-149.56,0.31) 5(-199.56,0.31) 6(-249.56,0.31) 7(-299.56,0.31) 8(-349.56,0.31) 9(-349.56,-219.69) 10(-299.56,-219.69) 11(-249.56,-219.69) 12(-199.56,-219.69) 13(-149.56,-219.69) 14(-99.56,-219.69) 15(-49.56,-219.69) 16(0.44,-219.69)
  silkscreen extent -350,-160 25,-60
SW-PB2 [mm]
  rect 1x1 smd: 1(-3.753,0.001) 2(3.747,0.001)
  silkscreen extent -3.25,-2 3.25,2
TSOP48 [mil]
  rect 79x10 smd: 1(0,0) 2(0,-19.69) 3(0,-39.37) 4(0,-59.06) 5(0,-78.74) 6(0,-98.43) 7(0,-118.11) 8(0,-137.8) 9(0,-157.48) 10(0,-177.17) 11(0,-196.85) 12(0,-216.54) 13(0,-236.22) 14(0,-255.91) 15(0,-275.59) 16(0,-295.28) 17(0,-314.96) 18(0,-334.65) 19(0,-354.33) 20(0,-374.02) 21(0,-393.7) 22(0,-413.39) 23(0,-433.07) 24(0,-452.76) 25(768.02,-452.76) 26(768.02,-433.07) 27(768.02,-413.39) 28(768.02,-393.7) 29(768.02,-374.02) 30(768.02,-354.33) 31(768.02,-334.65) 32(768.02,-314.96) 33(768.02,-295.28) 34(768.02,-275.59) 35(768.02,-255.91) 36(768.02,-236.22) 37(768.02,-216.54) 38(768.02,-196.85) 39(768.02,-177.17) 40(768.02,-157.48) 41(768.02,-137.8) 42(768.02,-118.11) 43(768.02,-98.43) 44(768.02,-78.74) 45(768.02,-59.06) 46(768.02,-39.37) 47(768.02,-19.69) 48(768.02,0)
  silkscreen extent -79,-461 847,12
USB-A [mm]
  round 1.5 hole 0.92: 1(0.009,0.013) 2(2.509,0.013) 3(4.509,0.013) 4(7.009,0.013)
  round 3 hole 2.3: 5(10.079,-2.697) 6(-3.061,-2.697)
  silkscreen extent -3.06,-12.98 10.04,1.12
XTAL-B [mm]
  oval 0.75x1.5 hole 0.5: 1(-1.004,0.017) 2(0.996,0.017)
  silkscreen extent -2.04,-7.98 2.03,2.05

## Part data
C1 C2: library part Cap, "Capacitor"
C3 C4 C5 C6: "Capacitor"
C7 C8 C9 C10 C11 C12 C13 C14 C15 C16 C17 C18 C19 C20 C21 C22 C23 C24 C25 C26 C27 C29 C40 C41 C42 C43 C44 C50 C51: library part CAP_1, "Capacitor"
C28 C30 C31 C32 C47: library part CAP_2, "Capacitor"
C46 C48 C49 C52: library part "CAPACITOR POL_0"
CN1: library part CON3_1
D1: library part LED
D2 D3 D4: library part LED0_1, "Typical INFRARED GaAs LED"
D5: library part "Diode 10TQ035", "Schottky Rectifier"
DS1 DS2: "7.62 mm Black Surface HER 7-Segment Display: CC, RH DP"
J1 J2: library part "Header 22X2", "Header, 22-Pin, Dual row"
J9: library part "CONNECTOR DB9"
"P5      JTAG": "Header, 10-Pin, Dual row, Right Angle"
R1 R9 R10 R11 R12 R13 R22 R32 R38 R39: library part Res2_1, "Resistor"
R2 R3 R16 R17 R18 R28 R29 R30 R34 R35 R36 R37: library part RES
R14 R15 R19 R20 R21 R23 R24 R25: library part RES2_2
R40 R41: "Isolated Resistor Network"
S2: library part SW-PB, "Switch"
U3: library part S3C2410A-20, "32-Bit RISC Microprocessor, 200 MHz, 1.8V (Core), 3.3V (Memory and IO), 272-Pin FBGA"
U4: "512Mb Synchronous High Data Rate DRAM, 8Mb x 16Bit x 4 Banks, 54-Pin TSOP"
U5 U6 U7 U8: "Octal Bus Transceiver 3-State Non-Inverting"
U9: library part K9F2808
U10: library part SN74HC21N, "Dual 4-Input Positive-AND Gate"
U11: library part DM9000A, "网络芯片"
U12: library part H1012
U13 U14: library part LM1117MP-3.3, "800mA Low-Dropout Linear Regulator"
U16 U19: "8-Bit Shift Register with 3-State Output Registers"
U17: "4-Pin 礟 Voltage Monitors with Manual Reset Input"
U18: library part MAX232SOP
USB-HOST: library part USBPORT
X1: library part CRYSTAL
X2: library part CRYSTAL_1
X3: library part CRYSTAL_2

## Free pads (board coordinates)
  round 60 hole 30: 0(6015,6115) 1(6015,6115) 2(6015,6115) 3(6005,6120) 4(6025,6120)

## Via types
v1: diameter 18, hole 10, Top Layer to Bottom Layer, 574 vias
v2: diameter 16, hole 8, Top Layer to Bottom Layer, 155 vias
v3: diameter 16, hole 12, Top Layer to Bottom Layer, 1 vias

## Nets (pads, with @x,y where several pads share a name; then routed paths per layer and width w, separated by ;. In a path a pad name is that pad's centre, name@x,y a point inside that pad or via, vN(x,y) a via of type N, cw(c..) or ccw(c..) an arc to the next point about the centre after c; other vN are vias at no path point)
A0: J1.31 U7.15 | length 1386.3
  Top Layer w4: J1.31@3305,4585 3350,4585 v1(3457,4478) ; v1(4477,4255) U7.15@4554.57,4255
  Mid-Layer2 w4: v1(3457,4478) 4254,4478 v1(4477,4255)
A1: J1.30 U7.16 | length 1564.5
  Top Layer w4: v1(4168,4205) U7.16@4554.57,4205
  Mid-Layer2 w4: J1.30@3205,4485 3264,4426 3264,4257 3280,4241 4132,4241 v1(4168,4205)
A2: J1.29 U7.17 | length 1386.3
  Top Layer w4: v1(4446,4155) U7.17@4554.57,4155
  Mid-Layer2 w4: J1.29@3305,4485 3519,4271 4330,4271 v1(4446,4155)
A3: J1.28 U7.18 | length 1675.2
  Top Layer w4: v1(4445,4105) U7.18@4554.57,4105
  Bottom Layer w4: J1.28@3205,4385 3251,4339 3322,4339 3341,4320 3341,4256 3320,4235 3296,4235 3269,4208 3269,4160 3280,4149 4401,4149 v1(4445,4105)
A4: J1.27 U5.11 | length 1539.2
  Top Layer w4: v1(4502,5060) U5.11@4564.57,5060
  Bottom Layer w4: J1.27@3305,4385 3876,4956 4398,4956 v1(4502,5060)
A5: J1.26 U5.12 | length 2023.1
  Top Layer w4: U5.12@4564.57,5010 v1(4627,5010)
  Bottom Layer w4: J1.26@3205,4285 3161.47,4328.53 3161.47,4408.47 3187,4434 3331.29,4434 3874.29,4977 4128,4977 4155,5004 4155,5072 4171,5088 4549,5088 v1(4627,5010)
A6: J1.25 U5.13 | length 1918.6
  Top Layer w4: v1(4453,4960) U5.13@4564.57,4960
  Bottom Layer w4: J1.25@3305,4285 3262,4328 3203,4328 3169.47,4361.53 3169.47,4400.47 3191,4422 3233,4422 3255,4400 3255,4376 3281.53,4349.47 3322,4349.47 3340.53,4368 3340.53,4387.53 3874,4921 4414,4921 v1(4453,4960)
A7: J1.24 U5.14 | length 2449.5
  Top Layer w4: J1.24@3205,4185 3169,4221 3169,5008 3194,5033 v1(3534,5033) ; U5.14@4564.57,4910 v1(4627,4910)
  Mid-Layer2 w4: v1(3534,5033) 3570,5069 4468,5069 v1(4627,4910)
A8: J1.23 U5.15 | length 1539.2
  Top Layer w4: v1(4474,4860) U5.15@4564.57,4860
  Bottom Layer w4: J1.23@3305,4185 3799,4185 v1(4474,4860)
A9: J1.22 U5.16 | length 1972.4
  Top Layer w4: v1(4459,4786) 4483,4810 U5.16@4564.57,4810
  Mid-Layer2 w4: J1.22@3205,4085 3161.47,4128.53 3161.47,4513.47 3183,4535 4192,4535 4443,4786 v1(4459,4786)
A10: J1.21 U5.17 | length 1990.6
  Top Layer w4: v1(4503,4760) U5.17@4564.57,4760
  Mid-Layer2 w4: J1.21@3305,4085 3254,4136 3254,4400 3233,4421 3206,4421 3169.47,4457.53 3169.47,4501.47 3189,4521 4264,4521 v1(4503,4760)
A11: J1.20 U5.18 | length 2082.3
  Top Layer w4: U5.18@4564.57,4710 4619,4710 v1(4627,4702)
  Mid-Layer2 w4: J1.20@3205,3985 3268,4048 3895,4048 3903,4056 4481,4056 4555,4130 4555,4638 4619,4702 v1(4627,4702)
AIN0: J2.35 U3.U16 | length 2678.1
  Top Layer w4: U3.U16@6491.97,4760.47 6524.84,4760.47 6611,4846.63 v1(6611,4861)
  Mid-Layer2 w4: v1(6611,4861) 8767.19,4861 8886.19,4980 9000,4980 J2.35@9050,4930
AIN1: J2.34 U3.T15 | length 2532.2
  Top Layer w4: U3.T15@6460.47,4728.98 v2(6475,4743.5) 6475,4745 6525,4745 v1(6539,4745)
  Mid-Layer2 w4: v1(6539,4745) 6611,4817 8843,4817 8856,4830 J2.34@8950,4830
AIN2: J2.37 U3.U17 | length 2797.7
  Top Layer w4: U3.U17@6491.97,4791.97 6524.84,4791.97 6524.84,4827.84 v1(6535,4838)
  Mid-Layer2 w4: v1(6535,4838) 6634,4838 6635,4839 8808,4839 8863,4894 9068,4894 9086,4912 9086,4994 J2.37@9050,5030
AIN3: J2.36 U3.T16 | length 2589.8
  Top Layer w4: U3.T16@6460.47,4760.47 6476.22,4776.22 6524.84,4776.22 6582,4833.38 v1(6582,4862)
  Mid-Layer2 w4: v1(6582,4862) 6598,4846 6626,4846 6630,4850 8780,4850 8860,4930 J2.36@8950,4930
AIN4: U3.R15 | length 108.9
  Top Layer w4: U3.R15@6428.98,4728.98 v1(6444.72,4744.72)
  Mid-Layer2 w4: v1(6444.72,4744.72) 6460.47,4760.47 6524.84,4760.47
AIN5: U3.T17
AIN6: U3.R16 | length 70.9
  Top Layer w4: U3.R16@6428.98,4760.47 6444.72,4776.22 6444.72,4824.84
AIN7: U3.N13 | length 171.9
  Top Layer w4: U3.N13@6365.98,4665.98 v1(6381.73,4681.73)
  Mid-Layer3 w4: v1(6381.73,4681.73) 6397.48,4697.48 6524.84,4697.48
AVDD25: C24.2 U11.2 U11.9 | length 1030
  Top Layer w4: v1(3958,3090.26) C24.2@3991.21,3090.26 ; v1(4192,3611) 4192.21,3610.79 4224,3610.79 ; U11.9@4278.58,3610.79 4224,3610.79 ; U11.2@4278.58,3748.58 4234.42,3748.58 4230,3753 4210,3753 4200,3743 4200,3634.79 4224,3610.79
  Mid-Layer3 w4: v1(3958,3090.26) 3958,3117 4248,3407 4248,3588 4225,3611 v1(4192,3611)
CDCLK: J2.24 U3.N6 | length 2631.9
  Top Layer w4: U3.N6@6365.98,4445.51 v1(6381.73,4429.76)
  Mid-Layer2 w4: v1(6576.86,4362) 8918,4362 J2.24@8950,4330
  Mid-Layer3 w4: v1(6381.73,4429.76) 6397.48,4414.02 6524.84,4414.02 v1(6576.86,4362)
CLKOUT0: J2.13 U3.R12 | length 3625.6
  Top Layer w4: U3.R12@6428.98,4634.49 v1(6444.72,4650.24)
  Mid-Layer2 w4: v1(6444.72,4650.24) 6524.84,4650.24 6545.75,4650.24 6689.51,4794 8898.94,4794 8906.47,4786.47 v1(9014,4786.47)
  Mid-Layer3 w4: v1(9014,4786.47) 9014,3866 J2.13@9050,3830
CLKOUT1: U3.U12
DATA0: J1.18 U8.11 | length 713.9
  Top Layer w4: v1(3484,3465) U8.11@3564.57,3465
  Mid-Layer2 w4: J1.18@3205,3885 3169,3849 3169,3664 3184,3649 3300,3649 v1(3484,3465)
DATA1: J1.17 U8.12 | length 665.8
  Top Layer w4: U8.12@3564.57,3415 v1(3627,3415)
  Bottom Layer w4: J1.17@3305,3885 3627,3563 v1(3627,3415)
DATA2: J1.16 U8.13 | length 711.6
  Top Layer w4: v1(3494,3365) U8.13@3564.57,3365
  Bottom Layer w4: J1.16@3205,3785 3169,3749 3169,3568 3188,3549 3310,3549 v1(3494,3365)
DATA3: J1.15 U8.14 | length 708.6
  Top Layer w4: U8.14@3564.57,3315 v1(3627,3315)
  Mid-Layer2 w4: J1.15@3305,3785 3378,3785 3561,3602 3561,3381 v1(3627,3315)
DATA4: J1.14 U8.15 | length 797.7
  Top Layer w4: v1(3502,3265) U8.15@3564.57,3265
  Mid-Layer2 w4: J1.14@3205,3685 3241,3721 3388,3721 3543,3566 3543,3306 v1(3502,3265)
DATA5: J1.13 U8.16 | length 632.4
  Top Layer w4: v1(3502,3215) U8.16@3564.57,3215
  Mid-Layer2 w4: J1.13@3305,3685 3509,3481 3509,3356 3487,3334 3487,3230 v1(3502,3215)
DATA6: J1.12 U8.17 | length 663
  Top Layer w4: v1(3496,3165) U8.17@3564.57,3165
  Mid-Layer2 w4: J1.12@3205,3585 3241,3549 3333,3549 3439,3443 3439,3222 v1(3496,3165)
DATA7: J1.11 U8.18 | length 724.4
  Top Layer w4: U8.18@3564.57,3115 v1(3627,3115)
  Mid-Layer2 w4: J1.11@3305,3585 3305,3569 3341,3569 3458,3452 3458,3220 3487,3191 3551,3191 v1(3627,3115)
DATA8: J1.10 U6.11 | length 1008.3
  Top Layer w4: J1.10@3205,3485 3169,3521 3169,3712 3201,3744 3352,3744 3368,3760 3368,4101 3392,4125 U6.11@3564.57,4125
DATA9: J1.9 U6.12 | length 801.5
  Top Layer w4: J1.9@3305,3485 3376,3556 3376,4064 3387,4075 U6.12@3564.57,4075
DATA10: J1.8 U6.13 | length 939.2
  Top Layer w4: v1(3502,4025) U6.13@3564.57,4025
  Mid-Layer3 w4: J1.8@3205,3385 3169,3421 3169,3712 3193,3736 3336,3736 3360,3760 3360,3883 v1(3502,4025)
DATA11: J1.7 U6.14 | length 740
  Top Layer w4: v1(3492,3975) U6.14@3564.57,3975
  Mid-Layer3 w4: J1.7@3305,3385 3343,3423 3343,3681 3420,3758 3420,3903 v1(3492,3975)
DATA12: J1.6 U6.15 | length 994.2
  Top Layer w4: J1.6@3205,3285 3169,3321 3169,3408 3182,3421 3341,3421 3406,3486 3406,3907 3424,3925 U6.15@3564.57,3925
DATA13: J1.5 U6.16 | length 761.1
  Top Layer w4: J1.5@3305,3285 3438,3418 3438,3857 3456,3875 U6.16@3564.57,3875
DATA14: J1.4 U6.17 | length 874.8
  Top Layer w4: v1(3502,3825) U6.17@3564.57,3825
  Mid-Layer3 w4: J1.4@3205,3185 3265,3245 3349,3245 3368,3264 3368,3691 v1(3502,3825)
DATA15: J1.3 U6.18 | length 753.5
  Top Layer w4: J1.3@3305,3185 3452,3332 3452,3758 3469,3775 U6.18@3564.57,3775
DMRX+: R15.1 U11.3 U12.6 | length 7118.1
  Top Layer w4: v1(3717.32,6000) U12.6@3775,6000 v1(3869,6000) ; v1(4216,3737) 4224.1,3728.9 U11.3@4278.58,3728.9 ; v1(8015,5772) R15.1@8015,5815
  Mid-Layer3 w4: v1(3717.32,6000) 3717.32,5484.69 3841,5361 3841,5326 4048,5119 4048,3905 v1(4216,3737)
  Bottom Layer w4: v1(3869,6000) 4021,5848 6127,5848 6381,5594 7837,5594 v1(8015,5772)
DMRX-: R14.1 U11.4 U12.8 | length 2958.8
  Top Layer w4: U12.8@3775,6100 3952,6100 3969,6083 3969,5242 4141,5070 4141,4966 4043,4868 4043,4512 R14.1@4295,4260 v1(4295,4303) ; U11.4@4278.58,3709.21 4320.21,3709.21 v1(4333,3722)
  Mid-Layer3 w4: v1(4295,4303) 4272,4280 4272,3783 v1(4333,3722)
DMTX+: R12.2 U11.7 U12.1 | length 3231.1
  Top Layer w4: R12.2@3149.58,6010.47 3229.47,6010.47 v1(3230,6011) ; v1(3491,5750) U12.1@3775,5750 v1(3909,5750) ; U11.7@4278.58,3650.16 4352,3650.16 v1(4360,3658.16)
  Mid-Layer3 w4: v1(3909,5750) 4141,5518 4141,4046 4251,3936 4251,3767.16 v1(4360,3658.16)
  Bottom Layer w4: v1(3230,6011) v1(3491,5750)
DMTX-: R13.2 U11.8 U12.3 | length 2601.3
  Top Layer w4: U12.3@3775,5850 v1(3833,5850) ; v1(3859,5620.47) 3887.47,5620.47 ; v1(3872,5605) 3887.47,5620.47 ; R13.2@3919.58,5620.47 3887.47,5620.47 ; U11.8@4278.58,3630.47 4332.53,3630.47 v1(4333,3630)
  Mid-Layer3 w4: v1(3833,5850) 3833,5646.47 v1(3859,5620.47) ; v1(3872,5605) 3941,5536 3941,5248 4058,5131 4058,4909 4095,4872 4095,3973 4240,3828 4240,3723 v1(4333,3630)
DN0: R38.2 U3.T12 | length 2478
  Top Layer w4: U3.T12@6460.47,4634.49 6476.22,4650.24 6524.84,4650.24 6535,4640.08 6535,4608 6542,4601 6576,4601 6583,4608 6583,4631 6567,4647 6567,4735 6626,4794 v1(6626,5120) ; v1(8331,5120) 8331.47,5120.47 R38.2@8389.58,5120.47
  Mid-Layer2 w4: v1(6626,5120) v1(8331,5120)
DP0: R39.2 U3.P13 | length 3175.3
  Top Layer w4: R39.2@4534.58,6055.47 v1(4655.53,6055.47) ; v2(6381.5,4650) U3.P13@6397.48,4665.98
  Mid-Layer3 w4: v1(6127,5936) 6192,5871 v1(6192,4852)
  Bottom Layer w4: v1(4655.53,6055.47) 4775,5936 v1(6127,5936) ; v1(6192,4852) 6209,4835 6209,4640 6214,4635 6366.5,4635 v2(6381.5,4650)
DUSBVBUS: R32.1
EINI1: J1.42
EINI6: J2.40
EINT0: J1.41 U3.N14 | length 3678.1
  Top Layer w4: U3.N14@6365.98,4697.48 v1(6381.73,4713.23)
  Mid-Layer2 w4: J1.41@3305,5085 6178,5085 6289,4974 6289,4871 6263,4845 6263,4675 6272,4666 6392,4666 6397.48,4671.48 6397.48,4728.98 ; v1(6381.73,4713.23) 6397.48,4728.98 ; 6397.48,4824.84 6397.48,4728.98
EINT1: U3.N17 | length 32.9
  Top Layer w4: U3.N17@6365.98,4791.97 6365.98,4824.84
EINT2: U3.M16 U11.34 | length 2662.4
  Top Layer w4: U11.34@4601.42,3728.9 5035.9,3728.9 v1(5060,3753) ; v1(6258,4886) 6289.08,4886 6350.24,4824.84 6350.24,4776.22 U3.M16@6334.49,4760.47
  Bottom Layer w4: v1(5060,3753) 5060,4211 5072,4223 5106,4223 5359,4476 5682,4476 5702,4496 5702,4598 5869,4765 5984,4765 6117.16,4898.16 6245.84,4898.16 v1(6258,4886)
EINT3: U3.M17 | length 32.9
  Top Layer w4: U3.M17@6334.49,4791.97 6334.49,4824.84
EINT4: J2.39 U3.M15 | length 3133.1
  Top Layer w4: U3.M15@6334.49,4728.98 v1(6350.24,4744.72)
  Mid-Layer2 w4: v1(6350.24,4744.72) 6350.24,4824.84 6363,4837.61 6363,5126 6374,5137 8797,5137 8840,5094 9014,5094 J2.39@9050,5130
EINT5: U3.M14 | length 140.4
  Top Layer w4: U3.M14@6334.49,4697.48 v1(6350.24,4713.23)
  Mid-Layer2 w4: v1(6350.24,4713.23) 6365.98,4728.98 6365.98,4824.84
EINT6: U3.L15 | length 102.4
  Top Layer w4: U3.L15@6302.99,4728.98 v1(6318.74,4744.72)
  Mid-Layer2 w4: v1(6318.74,4744.72) 6318.74,4824.84
EINT7: U3.L17 | length 32.9
  Top Layer w4: U3.L17@6302.99,4791.97 6302.99,4824.84
EINT9: U3.U8
EINT10: R9.2 R32.2 U3.T8 | length 3396.3
  Top Layer w4: R32.2@4689.58,3165.47 4769,3165.47 4769.89,3164.58 R9.2@4849.53,3164.58 4849.53,3459.53 5323,3933 v1(5759,3933) ; U3.T8@6460.47,4508.5 v2(6476.97,4525) 6525,4525 6535,4535 6645,4535 6718,4608 6718,4624 6736,4642 6753,4642 6773,4622 6773,4462 6530,4219 v1(6530,4122)
  Bottom Layer w4: v1(5759,3933) 5929,4103 6511,4103 v1(6530,4122)
EINT11: U3.L9 | length 44.5
  Top Layer w4: U3.L9@6302.99,4540 v1(6318.74,4524.25)
  Mid-Layer3 w4: v1(6318.74,4524.25) 6334.49,4508.5
EINT12: U3.P9
EINT18: J2.21 U3.P10 | length 3140.1
  Top Layer w4: U3.P10@6397.48,4571.5 v1(6413.23,4587.24)
  Mid-Layer2 w4: v1(6413.23,4587.24) 6428.98,4602.99 6524.84,4602.99 ; 6446.99,4602.99 6398,4554 6398,4363 6541,4220 8190,4220 8219,4191 9011,4191 J2.21@9050,4230
ETH_LNK: J3.12 R17.1 | length 2155.9
  Top Layer w4: J3.12@3835.08,6365.2 3951.8,6365.2 4261,6056 4261,4642 4231,4612 4231,4525.47 4256,4500.47 R17.1@4279.58,4500.47
ETH_SPD: J3.10 R16.1 | length 2316.1
  Top Layer w4: v1(4372,4490.47) R16.1@4404.58,4490.47
  Mid-Layer3 w4: J3.10@3385.08,6365.2 4161,5589.27 4161,4701.47 v1(4372,4490.47)
FALE: U3.G14 U9.17 | length 1817.9
  Top Layer w4: v1(6161.26,4713.23) U3.G14@6177.01,4697.48 ; v1(6566,3780) v1(6566,3780) U9.17@7060,3779.96
  Mid-Layer2 w4: 6145.51,4824.84 6145.51,4728.98 ; v1(6161.26,4713.23) 6145.51,4728.98 ; v1(6566,3780) 6335,4011 6335,4554 6293.76,4595.24 6209,4595.24 6207.89,4596.35 6189.65,4596.35 6145.51,4640.49 6145.51,4728.98
FCLE: U3.H12 U9.16 | length 1805.1
  Top Layer w4: v1(6192.76,4650.24) U3.H12@6208.5,4634.49 ; v1(6851,3760) 6851.28,3760.28 U9.16@7060,3760.28
  Mid-Layer2 w4: v1(6192.76,4650.24) 6208.5,4665.98 ; 6208.5,4863.5 6208.5,4665.98 ; v1(6851,3760) 6646,3760 6366,4040 6366,4555.92 6318.68,4603.24 6213.27,4603.24 6208.5,4608 6208.5,4665.98
FRB: R2.1 U3.R13 U9.7 | length 2255.4
  Top Layer w4: U3.R13@6428.98,4665.98 v1(6444.72,4681.73) ; v1(6998,3662) 6991,3655 6991,3592 6999.89,3583.11 U9.7@7060,3583.11 ; R2.1@7279.53,3239.58 7279.53,3207.47 v1(7280,3207)
  Mid-Layer2 w4: v1(6444.72,4681.73) 6460.47,4697.48 6524.84,4697.48 ; 6470.48,4697.48 6429,4656 6429,4640 6435,4634 6577,4634 6603,4608 v1(6603,4580)
  Mid-Layer3 w4: v1(6603,4580) 6589,4566 6589,4398 6838,4149 6838,3962 6998,3802 v1(6998,3662)
  Bottom Layer w4: v1(6998,3662) 7241.48,3418.52 7264,3418.52 7280,3402.52 v1(7280,3207)